# EAGLE board odd_v1 (EAGLE 6.2)
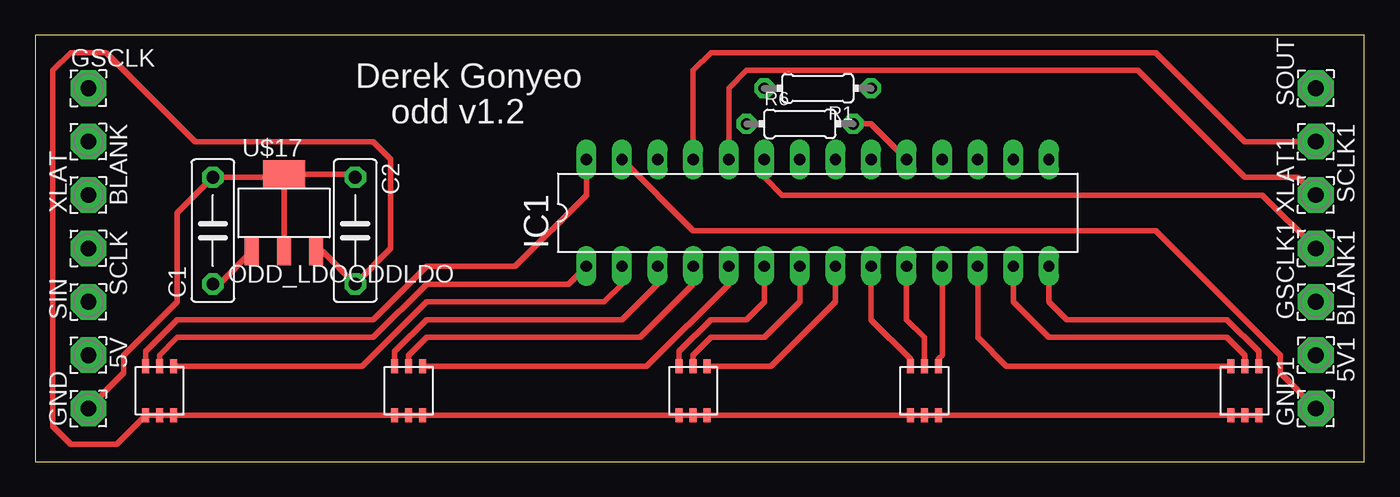
[diagram p0: board, top side]
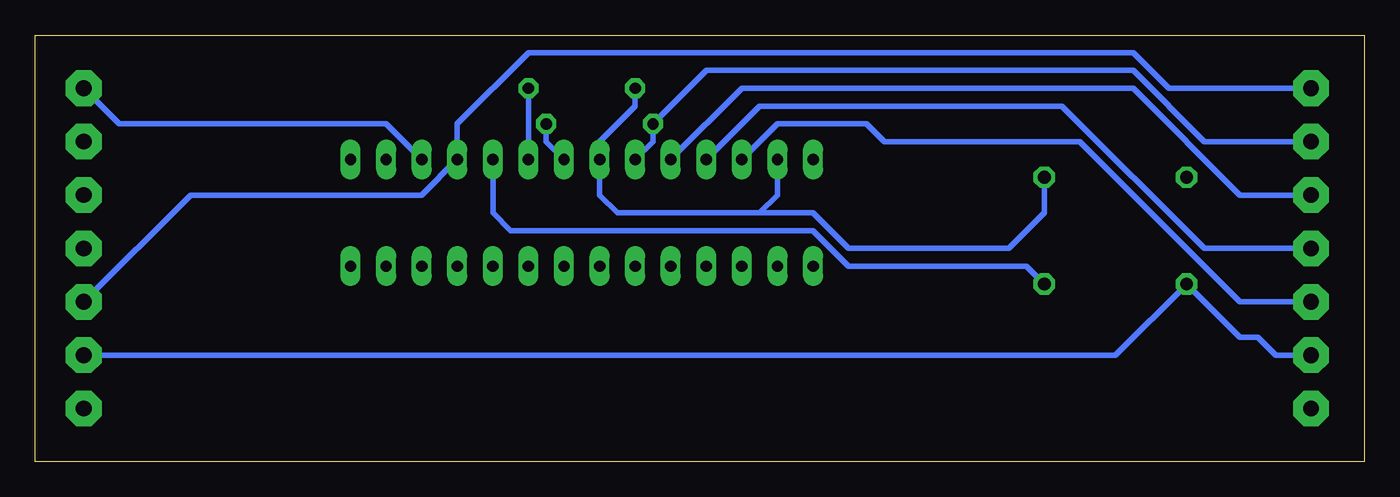
[diagram p1: board, bottom side, seen from below]

Size 94.92 x 30.47 mm. Coordinates in mm from the lower left corner, seen from the top.
Outline: 0,0 94.92,0 94.92,30.47 0,30.47 0,0
Copper layers (1*16): Top 0.035mm / dielectric 1.5mm / Bottom 0.035mm
Design rules: minimum track width 8mil, minimum drill 20mil, track to track 8mil, track to pad 8mil, pad to pad 8mil, via to via 8mil, smd to smd 8mil, copper to edge 10mil, drill to drill 8mil, minimum pad ring 12mil, minimum via ring 10mil, stop-mask expansion 4mil, vias tented up to drill 25mil, thermal gap 10mil

## Footprints (pad centres in the part's own frame; a part is rotated, then mirrored left to right if it is on the bottom)
2,54/1,1 = drill 1.118 pad 2.54 octagon: 1 0,0
C075-032X103 = drill 0.914 octagon: 1 -3.81,0; 2 3.81,0
DIP28 = drill 0.813 long: 1 -15.24,-3.81; 2 -12.7,-3.81; 3 -10.16,-3.81; 4 -7.62,-3.81; 5 -5.08,-3.81; 6 -2.54,-3.81; 7 0,-3.81; 8 2.54,-3.81; 9 5.08,-3.81; 10 7.62,-3.81; 11 10.16,-3.81; 12 12.7,-3.81; 13 15.24,-3.81; 14 17.78,-3.81; 15 17.78,3.81; 16 15.24,3.81; 17 12.7,3.81; 18 10.16,3.81; 19 7.62,3.81; 20 5.08,3.81; 21 2.54,3.81; 22 0,3.81; 23 -2.54,3.81; 24 -5.08,3.81; 25 -7.62,3.81; 26 -10.16,3.81; 27 -12.7,3.81; 28 -15.24,3.81
0204/7 = drill 0.813 octagon: 1 -3.81,0; 2 3.81,0
6PADSMD = smd 1 x 0.5: B+ -1.75,1; B- 1.75,1; G+ -1.75,0; G- 1.75,0; R+ -1.75,-1; R- 1.75,-1
4PINLDO = smd 1 x 2: GND 0,-2.75; INPUT -2.3,-2.75; OUTPUT 2.3,-2.75 | smd 3 x 2: GND2 0,2.75

## Placement (x,y rotation side)
5V  [2,54/1,1]  3.81,7.62 270 top
5V1  [2,54/1,1]  91.44,7.62 270 top
BLANK  [2,54/1,1]  3.81,22.86 270 top
BLANK1  [2,54/1,1]  91.44,15.24 270 top
C1  [C075-032X103]  12.7,16.51 90 top
C2  [C075-032X103]  22.86,16.51 270 top
GND  [2,54/1,1]  3.81,3.81 90 top
GND1  [2,54/1,1]  91.44,3.81 90 top
GSCLK  [2,54/1,1]  3.81,26.67 0 top
GSCLK1  [2,54/1,1]  91.44,11.43 90 top
IC1  [DIP28]  54.61,17.78 0 top
R1  [0204/7]  55.88,26.67 180 top
R6  [0204/7]  54.61,24.13 0 top
SCLK  [2,54/1,1]  3.81,15.24 270 top
SCLK1  [2,54/1,1]  91.44,22.86 270 top
SIN  [2,54/1,1]  3.81,11.43 90 top
SOUT  [2,54/1,1]  91.44,26.67 90 top
U$1  RGBLED  [6PADSMD]  8.89,5.08 90 top
U$2  RGBLED  [6PADSMD]  26.67,5.08 90 top
U$3  RGBLED  [6PADSMD]  46.99,5.08 90 top
U$4  RGBLED  [6PADSMD]  63.5,5.08 90 top
U$5  RGBLED  [6PADSMD]  86.36,5.08 90 top
U$17  ODD_LDOODDLDO  [4PINLDO]  17.78,17.78 0 top
XLAT  [2,54/1,1]  3.81,19.05 90 top
XLAT1  [2,54/1,1]  91.44,19.05 90 top

## Library data of the parts
5V 5V1 BLANK BLANK1 GND GND1 GSCLK GSCLK1 SCLK SCLK1 SIN SOUT XLAT XLAT1 = wirepad
C1 C2 R1 R6 = resistor
IC1 = tcl5940
U$1-U$5 = odd_led
U$17 = ODD_LDO

## Nets
N$1: IC1.28 U$1.B-
N$2: IC1.1 U$1.G-
N$3: IC1.2 U$1.R-
N$4: IC1.3 U$2.B-
N$5: IC1.4 U$2.G-
N$6: IC1.5 U$2.R-
N$7: IC1.6 U$3.B-
N$8: IC1.7 U$3.G-
N$9: IC1.8 U$3.R-
N$10: IC1.26 SIN.1
N$11: IC1.14 U$5.R-
N$12: IC1.13 U$5.G-
N$13: IC1.12 U$5.B-
N$14: IC1.11 U$4.R-
N$15: IC1.10 U$4.G-
N$16: IC1.9 U$4.B-
N$17: IC1.25 SCLK1.1 SCLK.1
N$18: 5V1.1 5V.1 C1.1 U$17.INPUT
N$19: C1.2 C2.1 GND1.1 GND.1 IC1.22 IC1.27 R1.2 U$17.GND U$17.GND2
N$20: IC1.24 XLAT1.1 XLAT.1
N$21: GSCLK1.1 GSCLK.1 IC1.18
N$22: C2.2 IC1.19 IC1.21 R6.2 U$1.B+ U$1.G+ U$1.R+ U$2.B+ U$2.G+ U$2.R+ U$3.B+ U$3.G+ U$3.R+ U$4.B+ U$4.G+ U$4.R+ U$5.B+ U$5.G+ U$5.R+ U$17.OUTPUT
N$50: IC1.17 SOUT.1
N$54: BLANK1.1 BLANK.1 IC1.23 R6.1
N$58: IC1.20 R1.1

## Tracks (layer width: path | path; a pad name or v marks a point on that pad's centre or on a via)
N$1
  Top 0.406: U$1.B- 7.89,7.89 10.16,10.16 24.13,10.16 27.94,13.97 34.29,13.97 39.37,19.05 IC1.28
N$2
  Top 0.406: U$1.G- 8.89,7.62 10.16,8.89 24.13,8.89 27.94,12.7 38.1,12.7 IC1.1
N$3
  Top 0.406: U$1.R- 23.34,6.83 27.94,11.43 40.64,11.43 41.91,12.7 IC1.2
N$4
  Top 0.406: U$2.B- 25.67,7.89 27.94,10.16 41.91,10.16 44.45,12.7 IC1.3
N$5
  Top 0.406: U$2.G- 26.67,7.62 27.94,8.89 43.18,8.89 46.99,12.7 IC1.4
N$6
  Top 0.406: U$2.R- 43.66,6.83 49.53,12.7 IC1.5
N$7
  Top 0.406: U$3.B- 45.99,7.89 48.26,10.16 50.8,10.16 52.07,11.43 IC1.6
N$8
  Top 0.406: U$3.G- 46.99,7.62 48.26,8.89 52.07,8.89 54.61,11.43 IC1.7
N$9
  Top 0.406: U$3.R- 52.55,6.83 57.15,11.43 IC1.8
N$10
  Bottom 0.406: SIN.1 8.89,11.43 20.32,22.86 34.29,22.86 35.56,24.13 41.91,24.13 IC1.26
N$11
  Top 0.406: U$5.R- 87.36,7.89 85.09,10.16 73.66,10.16 72.39,11.43 IC1.14
N$12
  Top 0.406: U$5.G- 86.36,7.62 85.09,8.89 72.39,8.89 69.85,11.43 IC1.13
N$13
  Top 0.406: U$5.B- 69.37,6.83 67.31,8.89 IC1.12
N$14
  Top 0.406: U$4.R- 64.5,7.35 64.77,7.62 IC1.11
N$15
  Top 0.406: U$4.G- 63.5,8.89 62.23,10.16 IC1.10
N$16
  Top 0.406: U$4.B- 62.5,7.35 59.69,10.16 IC1.9
N$17
  Top 0.406: IC1.25 46.99,27.94 48.26,29.21 80.01,29.21 86.36,22.86 SCLK1.1
  Bottom 0.406: SCLK.1 11.43,15.24 21.59,25.4 43.18,25.4 IC1.25
N$18
  Top 0.406: C1.1 13.15,12.7 U$17.INPUT
  Bottom 0.406: 5V.1 6.35,7.62 7.62,8.89 8.89,8.89 C1.1 17.78,7.62 5V1.1
N$19
  Top 0.406: GND.1 6.35,6.35 6.35,7.62 10.16,11.43 10.16,17.78 C1.2 17.57,20.32 U$17.GND2 | U$17.GND2 U$17.GND | U$17.GND2 22.65,20.53 C2.1 | GND1.1 88.9,6.35 88.9,7.62 80.01,16.51 46.99,16.51 IC1.27
  Bottom 0.406: C2.1 22.86,17.78 25.4,15.24 36.83,15.24 39.37,17.78 43.18,17.78 | 43.18,17.78 53.34,17.78 54.61,19.05 IC1.22 54.61,22.86 52.07,25.4 R1.2 | IC1.27 41.91,19.05 43.18,17.78
N$20
  Top 0.406: IC1.24 49.53,26.67 50.8,27.94 78.74,27.94 86.36,20.32 90.17,20.32 XLAT1.1
  Bottom 0.406: XLAT.1 8.89,19.05 16.51,26.67 44.45,26.67 IC1.24
N$21
  Bottom 0.406: GSCLK.1 13.97,26.67 16.51,29.21 59.69,29.21 64.77,24.13 IC1.18 67.31,19.05 83.82,19.05 GSCLK1.1
N$22
  Top 0.406: U$5.R+ U$5.G+ U$5.B+ U$4.R+ U$4.G+ U$4.B+ U$3.R+ U$3.G+ U$3.B+ U$2.R+ U$2.G+ U$2.B+ U$1.R+ U$1.G+ U$1.B+ 5.83,1.27 2.54,1.27 1.27,2.54 1.27,27.94 2.54,29.21 5.08,29.21 11.43,22.86 24.13,22.86 25.4,21.59 25.4,15.24 C2.2 20.53,15.03 U$17.OUTPUT | R6.2 59.69,24.13 IC1.19
  Bottom 0.406: IC1.19 62.23,17.78 60.96,16.51 39.37,16.51 36.83,13.97 24.13,13.97 C2.2 | R6.2 58.42,22.86 IC1.21
N$50
  Bottom 0.406: IC1.17 69.85,24.13 88.9,24.13 SOUT.1
N$54
  Top 0.406: IC1.23 52.07,20.32 53.34,19.05 87.63,19.05 BLANK1.1
  Bottom 0.406: IC1.23 50.8,22.86 R6.1 46.99,27.94 16.51,27.94 11.43,22.86 BLANK.1
N$58
  Bottom 0.406: R1.1 IC1.20

## Text on the board
tNames: Derek Gonyeo | odd v1.2